# Altium PCB NICA_FEE.PcbDoc
Units mm, origin at the board's own origin, x right, y up, seen from the top; angles counter-clockwise.
Board outline 17.42 x 20 mm, 2 copper layers (Top Layer, Bottom Layer); 9 components, 7 nets, 27 pads, 8 vias.
Unrouted connection lines stored in the file: 2.
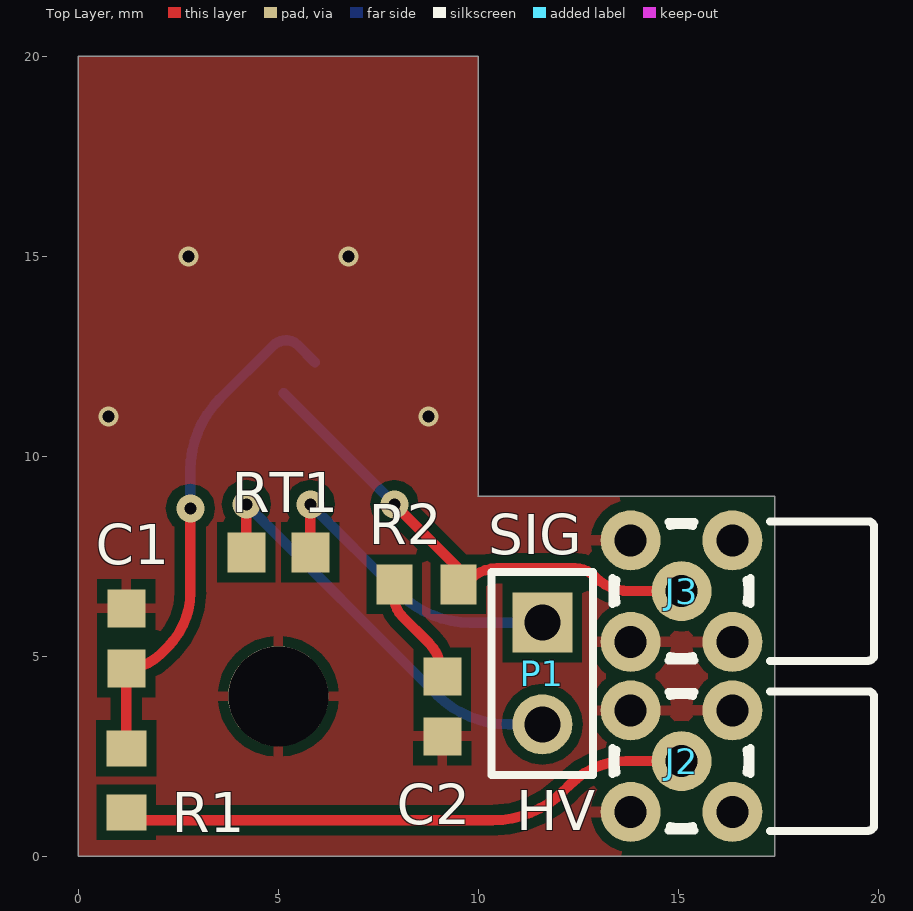
[diagram p0: Top Layer view]
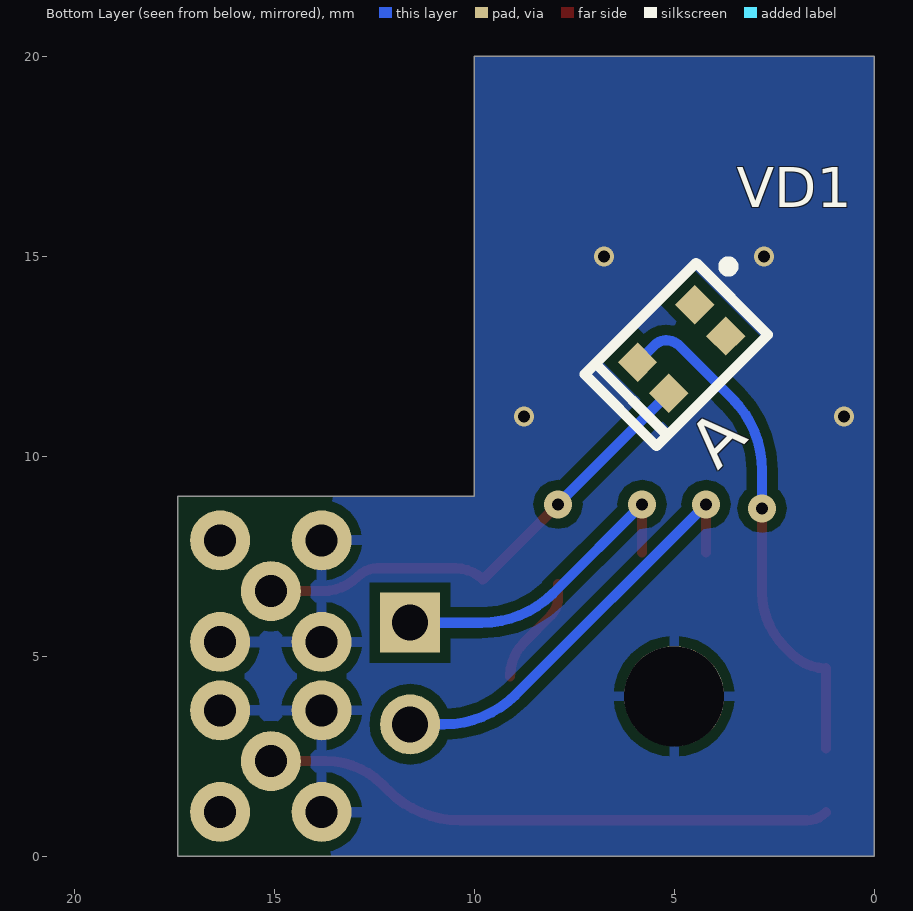
[diagram p1: Bottom Layer view, seen from below]
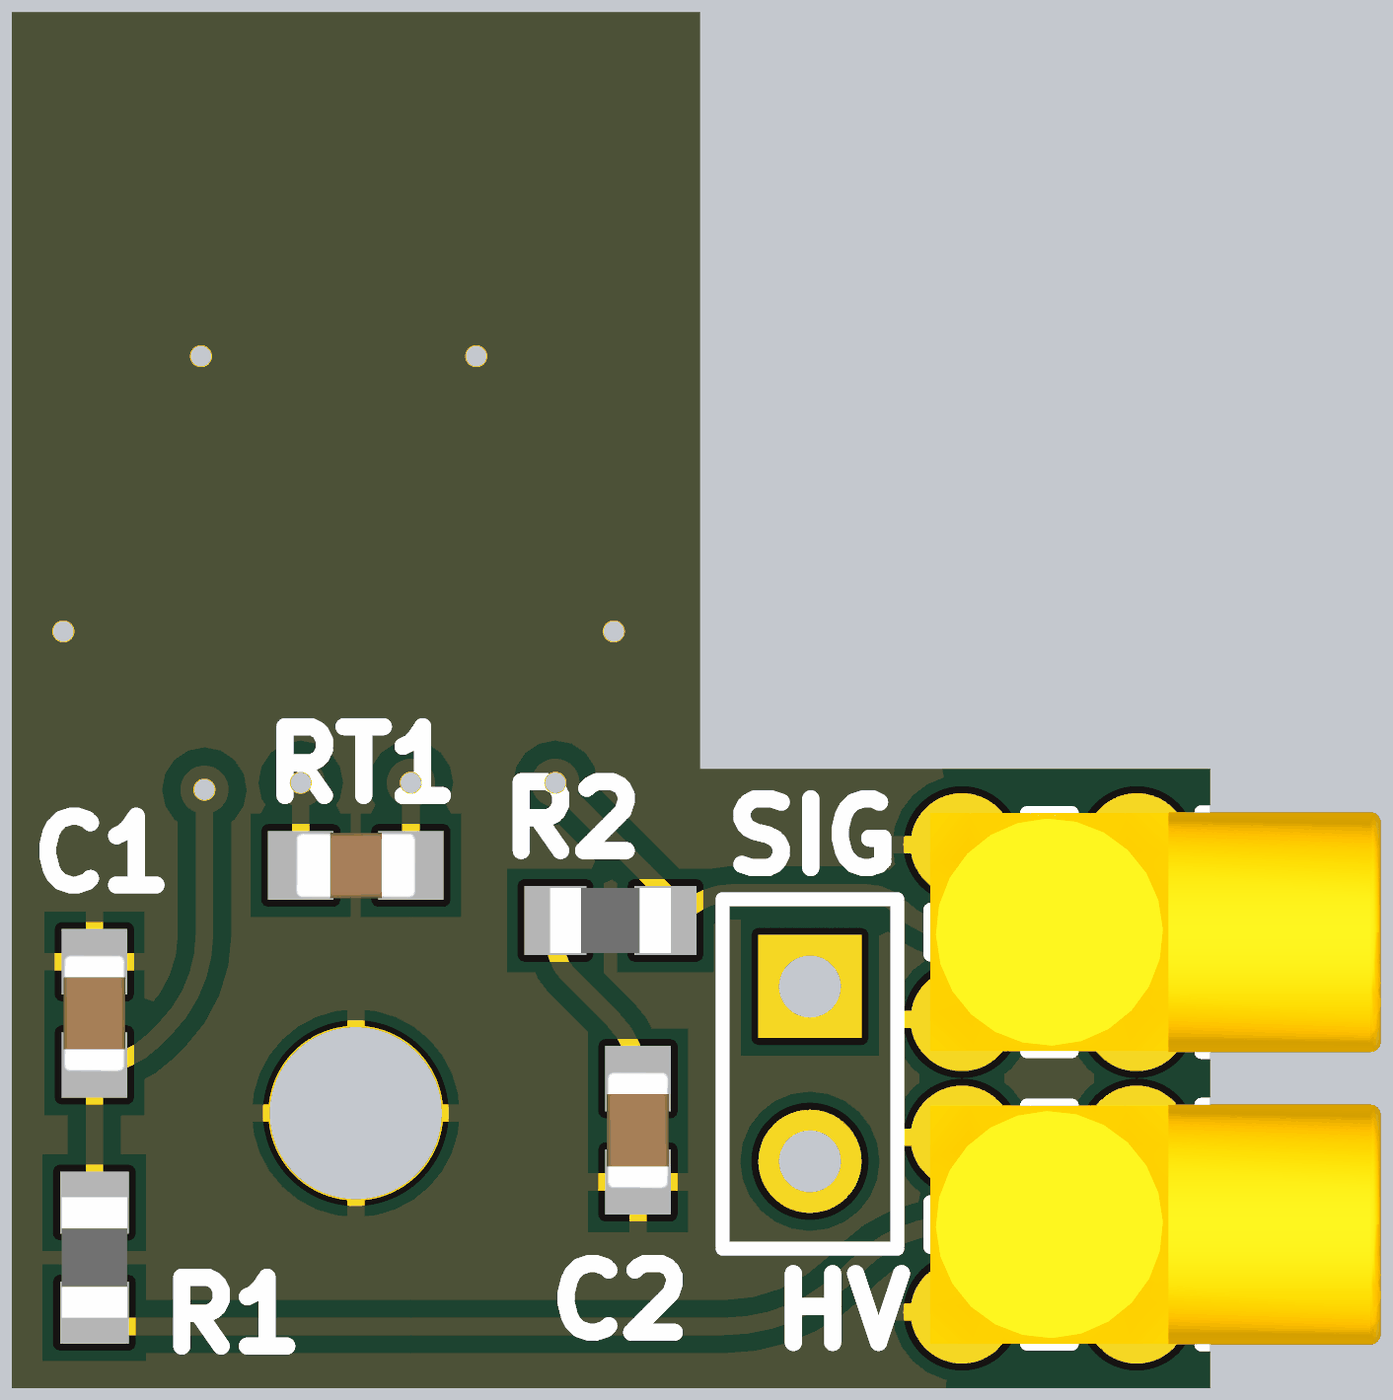
[diagram p2: 3D render of the assembled board from above, using the file's embedded part models]

## Layer stack, top to bottom
Top Solder: solder mask 0.0102, Solder Resist, Dk 3.5
Top Layer: signal copper 0.0356
Dielectric 1: dielectric 0.32, FR-4, Dk 4.8
Bottom Layer: signal copper 0.0356
Bottom Solder: solder mask 0.0102, Solder Resist, Dk 3.5

## Board outline
0,0 0,20 10,20 10,9 17.415,9 17.415,0

## Design rules (kind name [scope] priority, off if disabled: settings)
Clearance [All] p1: gap=0.254 ignorepadtopadclearanceinfootprint=FALSE except(0: Arc-Hole Track-Hole SMDPad-Hole THPad-Hole Via-Hole Fill-Hole Poly-Hole Region-Hole Text-Hole)
PolygonConnect [All] p1: connectstyle=Relief reliefconductorwidth=0.254 reliefentries=4 polygonreliefangle="90 Angle" airgapwidth=0.254
RoomDefinition main [InComponentClass('main')] p1: confinementstyle=ConfineIn formatcopy=TRUE lockcomponents=FALSE outline -6.5,29.5 42.5,29.5 42.5,42.25 -6.5,42.25
RoutingVias [All] p1: holewidth=0.3 width=0.7 viastyle="Through Hole" minholewidth=0.3 minwidth=0.7 maxholewidth=0.3 maxwidth=0.7
SolderMaskExpansion [All] p1: expansion=0.102 istentingtop=FALSE
Width [All] p1: maxlimit=0.254 minlimit=0.254 preferedwidth=0.254
30 further rules are at their usual default settings.

## Components (designator, comment, footprint, x,y, rotation, side; value= is the part's Value field where it differs from the comment)
C1 "100nF" CAPC1608X90N 1.2,5.45 r270 top
C2 "100nF" CAPC1608X90N 9.1,3.75 r90 top
J2 "Coax_1Female_1Shield" HUBER-SUHNER_85_MMCX-50-0-1/111_OE 15.08,2.38 r0 top
J3 "Coax_1Female_1Shield" HUBER-SUHNER_85_MMCX-50-0-1/111_OE 15.08,6.63 r0 top
P1 "Header 2" HDR1X2 11.6,5.84 r270 top
R1 "1k" RESC1608X55N 1.2,1.9 r270 top
R2 "49R9" RESC1608X55N 8.7,6.8 r0 top
RT1 "100k" THERMC1608X90N 5,7.6 r0 top
VD1 "S14160-1310PS Hamamatsu" S14160-1310PS 4.81,12.68 r135 bottom

## Footprints (in the part's own frame and the unit in brackets; to place one, negate y for a bottom-side part, rotate by r counter-clockwise, add the part's x,y. Pads: shape width x height; smd on the part's side, far side on the other; paste and mask are expansions set on the pad)
CAPC1608X90N [mm] "Chip Capacitor, Body 1.6x0.8mm IPC Medium Density"
  rect 0.95x0.95 smd: 1(-0.75,0) 2(0.75,0)
  body extent -0.85,-0.45 0.85,0.45, height 0.9
HDR1X2 [mm] "Connector; Header; 2 Position"
  rect 1.5x1.5 hole 0.9: 1(0,0)
  round 1.5 hole 0.9: 2(2.54,0)
  silkscreen extent -1.27,-1.27 3.81,1.27
HUBER-SUHNER_85_MMCX-50-0-1/111_OE [mm] "MMCX 50 Ohm Right Angle PCB Jack"
  round 1.5 hole 0.8: 1(0,0) 2(-1.27,-1.27) 2(-1.27,1.27) 2(1.27,-1.27) 2(1.27,1.27)
  silkscreen extent -1.73,-1.74 4.82,1.74, body extent -1.73,-1.74 4.82,1.74, height 3.8
RESC1608X55N [mm] "Chip Resistor, EIA 0603, Metric 1608, Body 1.6x0.8mm, IPC Medium Density"
  rect 0.9x1 smd: 1(-0.8,0) 2(0.8,0)
  body extent -0.87,-0.47 0.88,0.48, height 0.55
S14160-1310PS [mm]
  rect 0.7x0.7 smd: 1(1.012,0.55) 2(-1.012,0.55) 3(-1.013,-0.55) 4(1.012,-0.55)
  silkscreen extent -2.16,-1.27 2.41,1.27, body extent -1.31,-1.05 1.32,1.05, height 0.85
THERMC1608X90N [mm] "PTC Thermistors, Chip; 1.6mm L X 0.8mm W X 0.9mm H, IPC Medium Density"
  rect 0.95x1 smd: 1(-0.8,0) 2(0.8,0)
  body extent -0.87,-0.47 0.88,0.48, height 0.9

## Part data
C1 C2: library part CC0603_100NF_100V_10%_X7R, "Non-polarised capacitor", Case=0603, Manufacturer=GENERIC, Manufacturer1 ComponentHeight=0.9mm, Manufacturer1 Example=MURATA, Manufacturer1 Part Number=GRM188R72A104KA35D, Tolerance=±10%, Voltage=100V, Author="CERN DEM JLC", Component Type=Standard, CreateDate=11.12.2013, HelpURL=\\cern.ch\dfs\Applications\Altium\Datasheets\CC0603_MURATA_GRM188R72A104KA35D.pdf, LatestRevisionDate=11.12.2013, Manufacturer Part Number=CC0603_100NF_100V_10%_X7R, Mounted=Yes, Part Description="SMD Multilayer Chip Ceramic Capacitor", Part Number=CC0603_100NF_100V_10%_X7R, Pin Count=2, Sense=No, SMD=Yes, Socket=No, Status=None, TC=X7R
J2 J3: library part HUBER-SUHNER_85_MMCX-50-0-1/111_OE, Manufacturer=HUBER+SUHNER, Manufacturer Part Number=85_MMCX-50-0-1/111_OE, Author="CERN DEM JLC", Component Type=Standard, ComponentHeight=9.6mm, CreateDate=06.11.2014, Family=MMCX, HelpURL=\\cern.ch\dfs\Applications\Altium\Datasheets\HUBER-SUHNER_85_MMCX-50-0-1-111_OE.pdf, LatestRevisionDate=06.11.2014, Mounted=Yes, Part Description="MMCX 50 Ohms Right Angle PCB Jack", Part Number=HUBER-SUHNER_85_MMCX-50-0-1/111_OE, Pin Count=2, PressFit=No, Sense=No, SMD=No, Socket=No, Status=None
P1: "Header, 2-Pin", LatestRevisionDate=17-Jul-2002, LatestRevisionNote="Re-released for DXP Platform.", Publisher="Altium Limited"
R1: library part R0603_1K_1%_0.1W_100PPM, "Resistor - 1%", Case=0603, Manufacturer=GENERIC, Manufacturer1 ComponentHeight=0.55mm, Manufacturer1 Example="NIC COMPONENT", Manufacturer1 Part Number=NRC06F1001TRF, Power=0.1W, Tolerance=±1%, Author="CERN DEM JLC", Component Type=Standard, CreateDate=03.12.2007, HelpURL=\\cern.ch\dfs\Applications\Altium\Datasheets\R0603_NIC_NRC.pdf, LatestRevisionDate=13.03.2008, Manufacturer Part Number=R0603_1K_1%_0.1W_100PPM, Mounted=Yes, Part Description="General Purpose Thick Film Chip Resistor", Part Number=R0603_1K_1%_0.1W_100PPM, Pin Count=2, PressFit=No, Sense=No, SMD=Yes, Socket=No, Status=Preferred, TC=±100ppm/°C
R2: library part R0603_49R9_0.1%_0.063W_10PPM, "Resistor - 0.1%", Case=0603, Manufacturer=GENERIC, Manufacturer1 ComponentHeight=0.5mm, Manufacturer1 Example="TYCO HOLSWORTHY", Manufacturer1 Part Number=RN73C1J49R9BTDF, Power=0.063W, Tolerance=±0.1%, Author="CERN DEM JLC", Component Type=Standard, CreateDate=03.12.2007, HelpURL=\\cern.ch\dfs\Applications\Altium\Datasheets\R0603_Tyco_RN73.pdf, LatestRevisionDate=13.03.2008, Manufacturer Part Number=R0603_49R9_0.1%_0.063W_10PPM, Mounted=Yes, Part Description="Thin Film Chip Resistor", Part Number=R0603_49R9_0.1%_0.063W_10PPM, Pin Count=2, PressFit=No, Sense=No, SMD=Yes, Socket=No, Status="Not Recommended", TC=±10ppm
RT1: library part THERM_NTC_10K_EPCOS_B57330V2103J260, "Thermistor NTC (Negative Temperature Coefficient)", Case=0603, Manufacturer=EPCOS, Manufacturer Part Number=B57330V2103J260, Power=180mW, Tolerance=±5%, Author="CERN DEM BC", Component Type=Standard, ComponentHeight=0.9mm, CreateDate=30.07.2015, HelpURL=\\cern.ch\dfs\Applications\Altium\Datasheets\THERM_EPCOS_B573xxV2.pdf, LatestRevisionDate=30.07.2015, Mounted=Yes, Part Description="SMD NTC Thermistor for Temperature Measurement", Part Number=THERM_NTC_10K_EPCOS_B57330V2103J260, Pin Count=2, Sense=No, SMD=Yes, Socket=No, Status=None
VD1: library part S14160-1310PS, Manufacturer=Hamamatsu, Name=S14160-1310PS

## Free pads (board coordinates)
  round 2.5 hole 2.5: 5(5,4)

## Via types
v1: diameter 0.5, hole 0.3, Top Layer to Bottom Layer, tented both sides, 4 vias
v2: diameter 0.7, hole 0.3, Top Layer to Bottom Layer, tented both sides, 4 vias

## Nets (pads, with @x,y where several pads share a name; then routed paths per layer and width w, separated by ;. In a path a pad name is that pad's centre, name@x,y a point inside that pad or via, vN(x,y) a via of type N, cw(c..) or ccw(c..) an arc to the next point about the centre after c; other vN are vias at no path point)
GND: C1.1 C2.1 J2.2 J3.2 pad.5
  other v1: 0.75,11 8.75,11 2.75,15 6.75,15
NetC1_2: C1.2 R1.1 VD1.2 | length 12.9
  Top Layer w0.254: R1.1 C1.2 ccw(c1.2,5.907) 2.053,5.053 2.234,5.234 ccw(c0.869,6.6) 2.8,6.6 v2(2.8,8.7)
  Bottom Layer w0.254: v2(2.8,8.7) 2.8,9.648 cw(c5.34,9.648) 3.544,11.444 4.859,12.759 cw(c5.2,12.417) 5.2,12.9 cw(c5.2,12.495) 5.486,12.781 VD1.2
NetC2_2: C2.2 R2.1 | length 2.7
  Top Layer w0.254: R2.1 7.9,6.468 ccw(c8.548,6.468) 8.09,6.01 8.747,5.353 cw(c7.894,4.5) C2.2
NetJ2_1: J2.1 R1.2 | length 14.4
  Top Layer w0.254: R1.2 ccw(c1.683,1.583) 1.683,0.9 10.348,0.9 ccw(c10.348,3.44) 12.144,1.644 12.3,1.8 cw(c13.7,0.4) 13.7,2.38 J2.1
NetJ3_1: J3.1 R2.2 VD1.3 | length 12.1
  Top Layer w0.254: v2(7.9,8.8) 8.146,8.554 9.783,6.917 cw(c10.466,6.234) 10.466,7.2 12.417,7.2 cw(c12.417,6.517) 12.9,7 ccw(c13.793,7.893) 13.793,6.63 J3.1
  Bottom Layer w0.254: VD1.3 7.9,8.812 v2(7.9,8.8)
NetP1_1: P1.1 RT1.2 | length 8.1
  Top Layer w0.254: RT1.2 v2(5.8,8.8)
  Bottom Layer w0.254: v2(5.8,8.8) 8.016,6.584 ccw(c9.812,8.38) 9.812,5.84 P1.1
NetP1_2: P1.2 RT1.1 | length 10.8
  Top Layer w0.254: RT1.1 v2(4.2,8.8)
  Bottom Layer w0.254: v2(4.2,8.8) 8.956,4.044 ccw(c10.752,5.84) 10.752,3.3 P1.2
pads on no net: VD1.1 VD1.4

## Polygon pours and split planes (outlines as drawn)
GND on Bottom Layer "GND_L02_P001" (solid, pour order 1): 0,20 10,20 10,9 17.415,9 17.415,0 0,0
GND on Top Layer "GND_L01_P000" (solid, pour order 0): 0,20 10,20 10,9 17.415,9 17.415,0 0,0

## Silkscreen, mask and mechanical layers (free items; w line width, h text height)
Top Overlay:
  text "SIG" at 10.254,7.554 h1
  text "HV" at 10.954,0.654 h1
Mechanical 1:
  circle w0.254: c5,4 r2.5
  lines w0.1: 4.81,12.68 5,12.68 ; 5,0 5,12.68 ; 5,20 5,12.68
  lines w0.5: 0,0 17.415,0 17.415,9 10,9 10,20 0,20 0,0

## Text inside footprints (layer, text, board x,y; h text height)
VD1: Bottom Overlay "A" at 3.912,9.627 h1.2 r315